# Altium PCB EE3102_PCB_Proj.PcbDoc
Units mil, origin at the board's own origin, x right, y up, seen from the top; angles counter-clockwise.
Board outline 4200 x 2000 mil, 2 copper layers (Top Layer, Bottom Layer); 29 components, 31 nets, 132 pads, 5 vias.
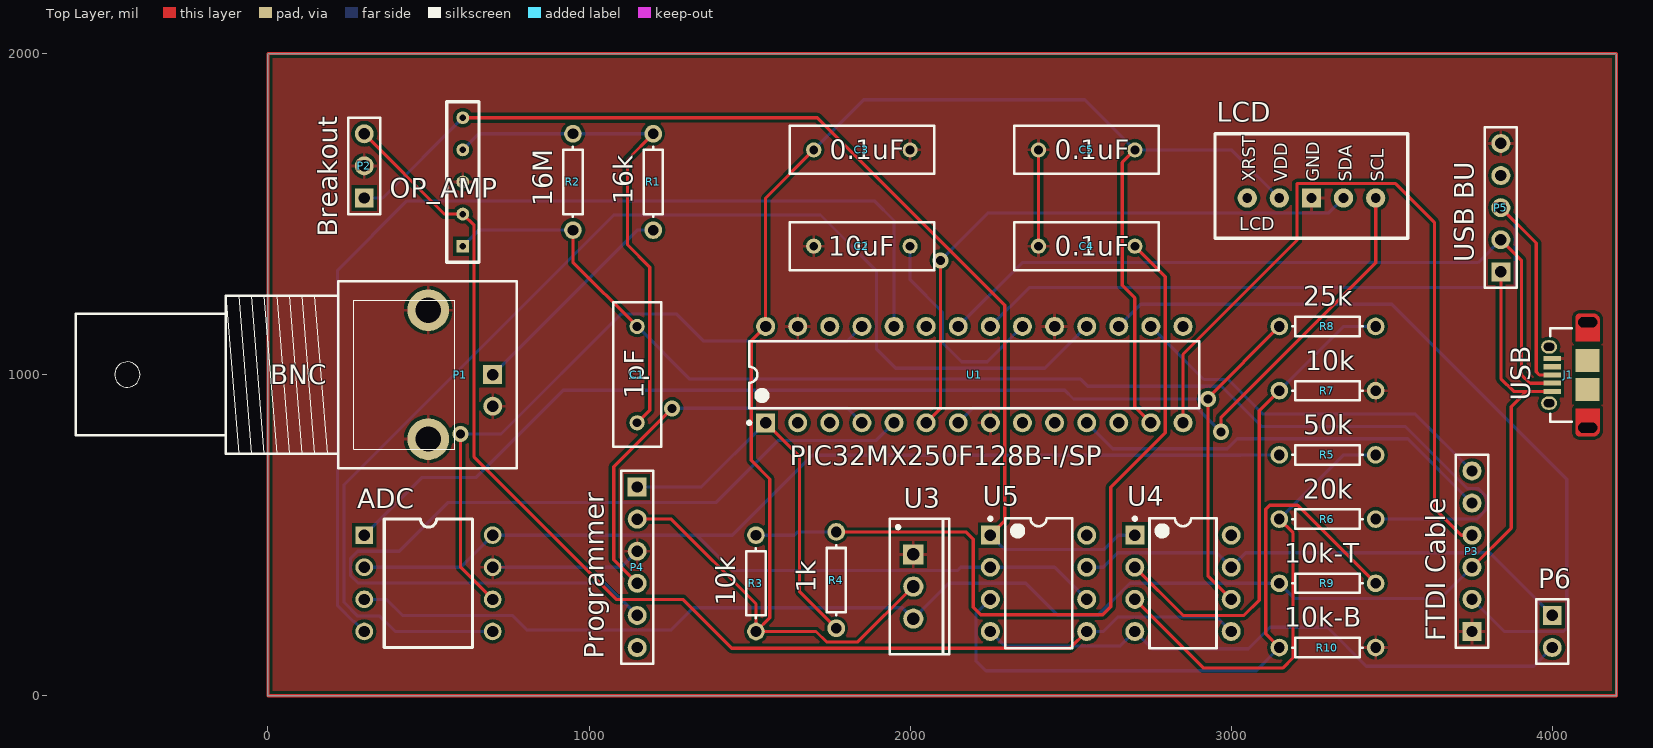
[diagram p0: Top Layer view]
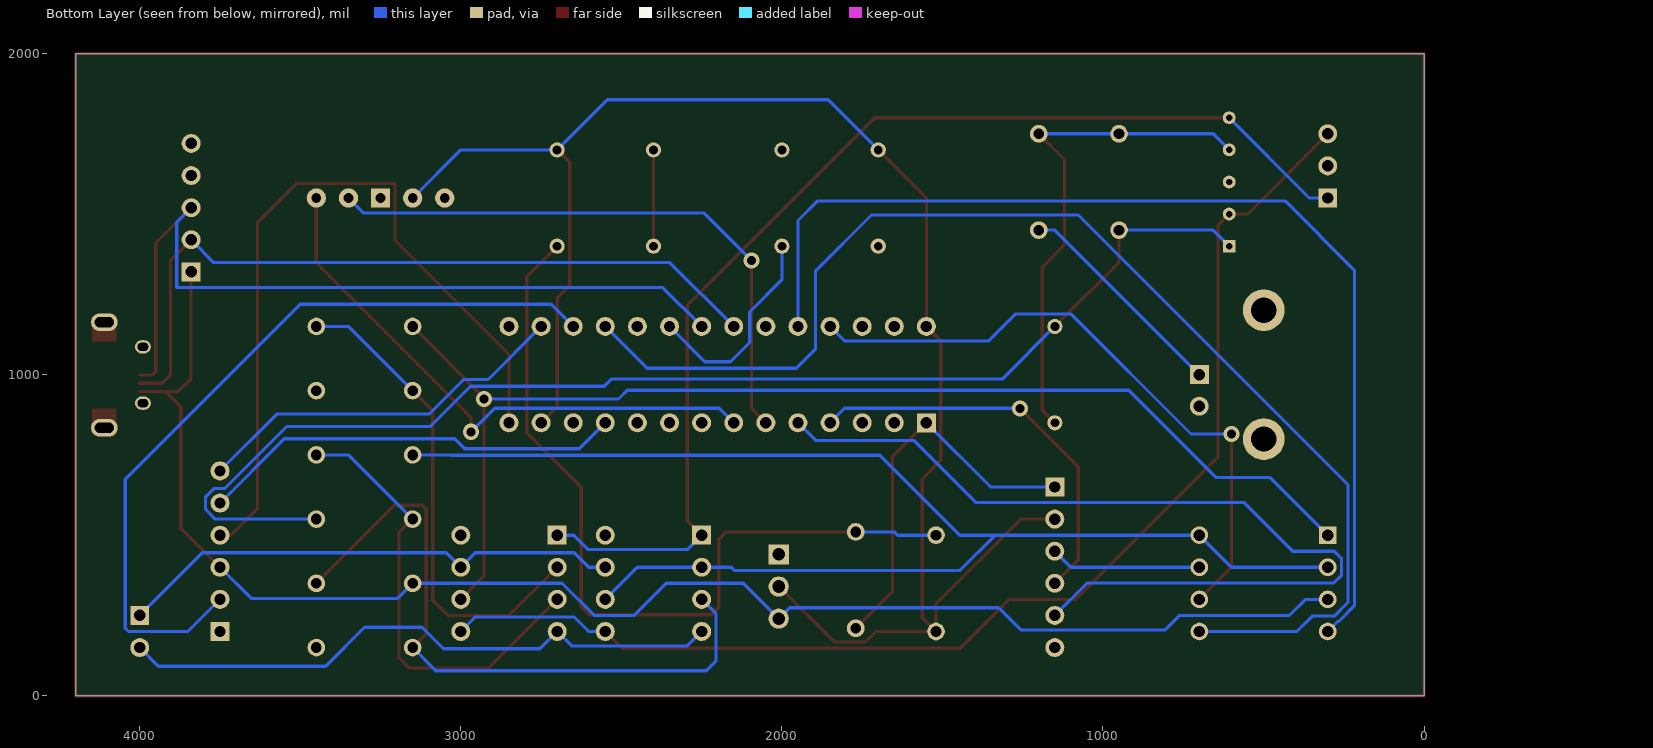
[diagram p1: Bottom Layer view, seen from below]

## Layer stack, top to bottom
Top Solder: solder mask 0.4, Solder Resist, Dk 3.5
Top Layer: signal copper 1.4
Dielectric 1: dielectric 12.6, FR-4, Dk 4.8
Bottom Layer: signal copper 1.4
Bottom Solder: solder mask 0.4, Solder Resist, Dk 3.5

## Board outline
0,0 4200,0 4200,2000 0,2000

## Design rules (kind name [scope] priority, off if disabled: settings)
Clearance [All] p1: gap=10 ignorepadtopadclearanceinfootprint=FALSE except(0: Arc-Hole Track-Hole SMDPad-Hole THPad-Hole Via-Hole Fill-Hole Poly-Hole Region-Hole Text-Hole)
PolygonConnect [All] p1: connectstyle=Relief reliefconductorwidth=10 reliefentries=4 polygonreliefangle="90 Angle" airgapwidth=10
RoomDefinition EE3102_PCB_Proj [InComponentClass('EE3102_PCB_Proj')] p1: confinementstyle=ConfineIn formatcopy=TRUE lockcomponents=FALSE outline 6045,-740 9135,-740 9135,800 6045,800
RoutingVias [All] p1: holewidth=28 width=50 viastyle="Through Hole" minholewidth=28 minwidth=50 maxholewidth=28 maxwidth=50
SolderMaskExpansion [All] p1: expansion=4
Width [All] p1: maxlimit=10 minlimit=10 preferedwidth=10
30 further rules are at their usual default settings.

## Components (designator, comment, footprint, x,y, rotation, side; value= is the part's Value field where it differs from the comment)
ADC "ADC" ADC 300,500 r0 top
C1 "1pF" RAD-0.3 1150,1000 r90 top
C2 "10uF" RAD-0.3 1850,1400 r180 top
C3 "0.1uF" RAD-0.3 1850,1700 r0 top
C4 "0.1uF" RAD-0.3 2550,1400 r180 top
C5 "0.1uF" RAD-0.3 2550,1700 r180 top
J1 "USB" 629105150921 4110.43,998.82 r90 top
LCD "LCD" LCD 3050,1550 r0 top
OP_AMP "Op_Amp_EE3102" OP_AMP 607,1400 r90 top
P1 "BNC" "BNC_RA CON" 700,1000 r0 top
P2 "Breakout" HDR1X3 300,1550 r90 top
P3 "FTDI Cable" HDR1X6 3750,200 r90 top
P4 "Programmer" HDR1X6 1150,650 r270 top
P5 "USB BU" HDR1X5 3840,1320 r90 top
P6 "Header 2" HDR1X2 4000,250 r270 top
R1 "16k" AXIAL-0.3 1200,1600 r90 top
R2 "16M" AXIAL-0.3 950,1600 r270 top
R3 "10k" AXIAL-0.3 1520,350 r270 top
R4 "1k" AXIAL-0.3 1770,360 r270 top value=1K
R5 "50k" AXIAL-0.3 3300,750 r180 top
R6 "20k" AXIAL-0.3 3300,550 r180 top
R7 "10k" AXIAL-0.3 3300,950 r180 top
R8 "25k" AXIAL-0.3 3300,1150 r180 top
R9 "10k-T" AXIAL-0.3 3300,350 r180 top value=10k
R10 "10k-B" AXIAL-0.3 3300,150 r180 top value=10k
U1 "PIC32MX250F128B-I/SP" MCHP-SPDIP-SP28 2200,1000 r90 top
U3 "(Volt Reg) LM1085IT-3.3" T03B 2010,340 r270 top
U4 "LM741CN" N08E 2850,350 r0 top
U5 "LM741CN" N08E 2400,350 r0 top

## Footprints (in the part's own frame and the unit in brackets; to place one, negate y for a bottom-side part, rotate by r counter-clockwise, add the part's x,y. Pads: shape width x height; smd on the part's side, far side on the other; paste and mask are expansions set on the pad)
629105150921 [mm] "Micro USB 2.0 Type AB Horizontal"
  rect 0.4x1.35 smd: 1(-1.3,2.805) 2(-0.65,2.805) 3(0,2.805) 4(0.65,2.805) 5(1.3,2.805)
  round 0 / inner oval 1.4x2.1 / far side oval 1.4x2.1 hole 0.825 slot 1.5 at 90 deg: Shell(-4.175,0)
  oval 1.05x1.25 hole 0.65 slot 0.85 at 90 deg: Shell(-2.225,3.055) Shell(2.225,3.055)
  rect 1.8x1.9 smd: Shell(-1.15,0) Shell(1.15,0)
  round 0 / inner round 0 / far side oval 1.4x2.1 hole 0.825 slot 1.5 at 90 deg: Shell(4.175,0)
  Top Layer region: -4.353,-0.95 -4.544,-0.912 -4.706,-0.804 -4.814,-0.641 -4.852,-0.45 -4.852,-0.45 -4.852,0.65 -4.83,0.765 -4.765,0.862 -4.667,0.927 -4.553,0.95 -4.553,0.95 -2.668,0.95 -2.668,-0.95
  Top Layer region: 4.353,-0.95 4.544,-0.912 4.706,-0.804 4.814,-0.641 4.852,-0.45 4.852,-0.45 4.852,0.65 4.83,0.765 4.765,0.862 4.667,0.927 4.553,0.95 4.553,0.95 2.668,0.95 2.668,-0.95
  silkscreen extent -3.7,1.25 3.7,2.97, body extent -4.3,-2.64 4.3,3.23, height 2.76
ADC [mil]
  rect 55x55 hole 35: 1(0,0)
  round 55 hole 35: 2(0,-100) 3(0,-200) 4(0,-300) 5(400,-300) 6(400,-200) 7(400,-100) 8(400,0)
  silkscreen extent 62,-350 338,50
AXIAL-0.3 [mm] "Axial Device, Thru-Hole; 2 Leads; 0.3 in Pin Spacing"
  round 1.4 hole 0.85: 1(-3.81,0) 2(3.81,0)
  silkscreen extent -2.77,-0.76 2.77,0.76
"BNC_RA CON" [mm] "Connector; BNC Elbow"
  rect 1.5x1.5 hole 0.9: 1(0,0)
  round 3.3 hole 2: 2(-5.1,-5.1) 2(-5.1,5.1)
  round 1.5 hole 0.9: 2(0,-2.5)
  silkscreen extent -33,-7.4 1.9,7.4
HDR1X2 [mm] "Connector; Header; 2 Position"
  rect 1.5x1.5 hole 0.9: 1(0,0)
  round 1.5 hole 0.9: 2(2.54,0)
  silkscreen extent -1.27,-1.27 3.81,1.27
HDR1X3 [mm] "Connector; Header; 3 Position"
  rect 1.5x1.5 hole 0.9: 1(0,0)
  round 1.5 hole 0.9: 2(2.54,0) 3(5.08,0)
  silkscreen extent -1.27,-1.27 6.35,1.27
HDR1X5 [mm] "Connector; Header; 5 Position"
  rect 1.5x1.5 hole 0.9: 1(0,0)
  round 1.5 hole 0.9: 2(2.54,0) 3(5.08,0) 4(7.62,0) 5(10.16,0)
  silkscreen extent -1.27,-1.27 11.43,1.27
HDR1X6 [mm] "Connector; Header; 6 Position"
  rect 1.5x1.5 hole 0.9: 1(0,0)
  round 1.5 hole 0.9: 2(2.54,0) 3(5.08,0) 4(7.62,0) 5(10.16,0) 6(12.7,0)
  silkscreen extent -1.27,-1.27 13.97,1.27
LCD [mil]
  round 60 hole 30: 1(0,0) 2(100,0) 4(300,0) 5(400,0)
  rect 60x60 hole 30: 3(200,0)
  silkscreen extent -100,-125 500,200
MCHP-SPDIP-SP28 [mm] "DIP, 28-Leads, Body 34.86x6.79mm, Pitch 2.54mm"
  rect 1.5x1.5 hole 0.9: 1(-3.81,16.51)
  round 1.5 hole 0.9: 2(-3.81,13.97) 3(-3.81,11.43) 4(-3.81,8.89) 5(-3.81,6.35) 6(-3.81,3.81) 7(-3.81,1.27) 8(-3.81,-1.27) 9(-3.81,-3.81) 10(-3.81,-6.35) 11(-3.81,-8.89) 12(-3.81,-11.43) 13(-3.81,-13.97) 14(-3.81,-16.51) 15(3.81,-16.51) 16(3.81,-13.97) 17(3.81,-11.43) 18(3.81,-8.89) 19(3.81,-6.35) 20(3.81,-3.81) 21(3.81,-1.27) 22(3.81,1.27) 23(3.81,3.81) 24(3.81,6.35) 25(3.81,8.89) 26(3.81,11.43) 27(3.81,13.97) 28(3.81,16.51)
  silkscreen extent -3.93,-17.8 2.65,17.93, body extent -3.95,-17.77 3.95,17.77, height 5.08
N08E [mm] "DIP, 8-Pin, Row Spacing 7.62 mm, Pitch 2.54 mm"
  rect 1.5x1.5 hole 0.9: 1(-3.81,3.81)
  round 1.5 hole 0.9: 2(-3.81,1.27) 3(-3.81,-1.27) 4(-3.81,-3.81) 5(3.81,-3.81) 6(3.81,-1.27) 7(3.81,1.27) 8(3.81,3.81)
  silkscreen extent -3.93,-5.15 2.65,5.23, body extent -3.6,-5.15 3.6,5.15, height 5.34
OP_AMP [mil]
  rect 40x40 hole 20: 1(0,0)
  round 40 hole 20: 2(100,0) 3(200,0) 4(300,0) 5(400,0)
  silkscreen extent -50,-50 450,50
RAD-0.3 [mm] "Radial Cap, Thru-Hole; 2 Leads; 0.3 in Pin Spacing"
  round 1.2 hole 0.7: 1(-3.81,0) 2(3.81,0)
  silkscreen extent -5.71,-1.91 5.71,1.91
T03B [mm] "TO, Thru-Hole, Vertical, Heatsink Mounted; 3 In-Line Leads; Pitch 2.54 mm"
  rect 1.6x1.6 hole 1: 1(-2.54,0)
  round 1.6 hole 1: 2(0,0) 3(2.54,0)
  silkscreen extent -5.35,-1.85 5.35,2.85, body extent -5.4,-1.9 5.4,2.9, height 19.4

## Part data
C1 C2 C3 C4 C5: library part Cap, "Capacitor", LatestRevisionDate=17-Jul-2002, LatestRevisionNote="Re-released for DXP Platform.", PackageDescription="Radial Cap, Thru-Hole; 2 Leads; 0.3 in Pin Spacing", PackageReference=RAD-0.3, Published=8-Jun-2000, Publisher="Altium Limited"
J1: library part 629105150921, "Micro USB 2.0 Type AB Receptacle WR-COM, Horizontal, SMT", Contact Resistance="30 mOhm", Operating Temperature="-40 to 85 degC", Rated Current="1.8 A", Working Voltage="30 VAC", ComponentLink1Description=Manufacturer, ComponentLink1URL=http://www.we-online.de, ComponentLink2Description=Datasheet, ComponentLink2URL=https://katalog.we-online.de/em/datasheet/629105150921.pdf, Connector Type="Micro USB 2.0 Type AB", Gender=Receptacle, Mounting Technology=SMT, Orientation=Horizontal, Packaging="Tape and Reel", Part Number=629105150921, Published Date="September 2018", Publisher="Wurth Elektronik"
OP_AMP: library part Op_Amp
P1: "BNC Elbow Connector", LatestRevisionDate=17-Jul-2002, LatestRevisionNote="Re-released for DXP Platform.", Publisher="Altium Limited"
P2: library part "Header 3", "Header, 3-Pin", LatestRevisionDate=17-Jul-2002, LatestRevisionNote="Re-released for DXP Platform.", Publisher="Altium Limited"
P3 P4: library part "Header 6", "Header, 6-Pin", LatestRevisionDate=17-Jul-2002, LatestRevisionNote="Re-released for DXP Platform.", Publisher="Altium Limited"
P5: library part "Header 5", "Header, 5-Pin", LatestRevisionDate=17-Jul-2002, LatestRevisionNote="Re-released for DXP Platform.", Publisher="Altium Limited"
P6: "Header, 2-Pin", LatestRevisionDate=17-Jul-2002, LatestRevisionNote="Re-released for DXP Platform.", Publisher="Altium Limited"
R1 R2 R3 R4 R5 R6 R7 R8 R9 R10: library part Res1, "Resistor", LatestRevisionDate=17-Jul-2002, LatestRevisionNote="Re-released for DXP Platform.", PackageDescription="Axial Device, Thru-Hole; 2 Leads; 0.3 in Pin Spacing", PackageReference=AXIAL-0.3, Published=8-Jun-2000, Publisher="Altium Limited"
U1: "32-bit Microcontroller with Audio and Graphics Interface, USB and Advanced Analog, 50 MHz, 19 I/O, PMP, -40 to 85 degC, 28-pin SPDIP (SP28), Tube", Manufacturer=Microchip, Supplier Part Number 1=PIC32MX250F128B-I/SP-ND, ComponentLink1Description="Manufacturer URL", ComponentLink1URL=http://www.microchip.com, ComponentLink2Description=Datasheet, ComponentLink2URL=http://ww1.microchip.com/downloads/en/DeviceDoc/61168E.pdf, ComponentLink3Description="Package Specification", ComponentLink3URL=http://www.microchip.com/stellent/groups/techpub_sg/documents/packagingspec/en012702.pdf, ComponentLink4Description="Product URL", ComponentLink4URL=http://www.microchip.com/PIC32MX250F128B, DatasheetVersion="Rev. E", Mounting Technology="Through Hole", PackageDescription="28-Lead Plastic Dual In-Line, 34.86 x 6.79 mm Body, 2.54 mm Pitch", PackageReference=SPDIP-SP28, PackageVersion=C04-070B, PartNumber=PIC32MX250F128B-I/SP, Supplier 1=Digi-Key, Supplier 2=Farnell, Supplier 3=Newark, Supplier 4=Mouser, Supplier Part Number 2=2097773, Supplier Part Number 3=73T1453, Supplier Part Number 4=579-32MX250F128BISP
U3: library part LM1085IT-3.3, "3A Low Dropout Positive Regulators, 3-pin TO-220", Manufacturer="National Semiconductor", PackageTopMarking=NSUZXYTTE#*LM1085*IT-3.3, PowerWise=N, ComponentLink1Description="Manufacturer URL", ComponentLink1URL=http://www.national.com/, ComponentLink2Description="LM1085 Datasheet", ComponentLink2URL=http://www.national.com/ds/LM/LM1085.pdf, ComponentLink3Description="LM1085 Web Page", ComponentLink3URL=http://www.national.com/pf/LM/LM1085.html, ComponentLink4Description="T03B Package Page", ComponentLink4URL=http://www.national.com/packaging/folders/t03b.html, CompType="LDO IC", DatasheetVersion=Jun-2005, High-Reliability=Y, PackageDescription="TO-220, Molded, 3 Lead, Straight", PackageReference=T03B, PackageVersion="revL, Jan-1992", PartNumber=LM1085IT-3.3, PinCount=3, RoHS=N
U4 U5: "Operational Amplifier, 8-pin MDIP", Manufacturer="National Semiconductor", PackageTopMarking=NSUZXYTTE#*LM*741CN, PowerWise=N, Code_JEDEC=MS-001-BA, ComponentLink1Description="Manufacturer URL", ComponentLink1URL=http://www.national.com/, ComponentLink2Description="LM741 Datasheet", ComponentLink2URL=http://www.national.com/ds/LM/LM741.pdf, ComponentLink3Description="LM741 Web Page", ComponentLink3URL=http://www.national.com/pf/LM/LM741.html, ComponentLink4Description="N08E Package Page", ComponentLink4URL=http://www.national.com/packaging/folders/n08e.html, CompType=Amplifiers, DatasheetVersion=Aug-2000, High-Reliability=Y, PackageDescription="MDIP, .365 x .250 x .130in, 8 Lead, .100in Pitch", PackageReference=N08E, PackageVersion="revG, May-2006", PartNumber=LM741CN, PinCount=8, RoHS=N

## Via types
v1: diameter 50, hole 28, Top Layer to Bottom Layer, 5 vias

## Nets (pads, with @x,y where several pads share a name; then routed paths per layer and width w, separated by ;. In a path a pad name is that pad's centre, name@x,y a point inside that pad or via, vN(x,y) a via of type N, cw(c..) or ccw(c..) an arc to the next point about the centre after c; other vN are vias at no path point)
GND: ADC.7 C2.2 C3.2 C4.2 C5.2 J1.5 LCD.3 OP_AMP.3 P1.2 P2.2 P3.1 P4.3 P5.5 R7.1 R10.1 U1.8 U1.19 U1.27 U3.1 | length 770.7
  Top Layer w10: C4.2 C5.2
  Bottom Layer w10: ADC.7 1100,400 P4.3
NetADC_1: ADC.1 R8.2 U4.6 | length 3797.8
  Top Layer w10: U4.6 2928,372 v1(2928,924) 2928,928 R8.2
  Bottom Layer w10: ADC.1 480,680 649,680 920,951 2482,951 2509,924 v1(2928,924)
NetADC_2: ADC.2 ADC.8 R5.2 U5.2 U5.6 | length 4300.1
  Bottom Layer w10: ADC.2 600,400 ADC.8 1336,500 ; U5.6 2450,400 U5.2 2158,400 2148,390 1446,390 1336,500 ; R5.2 3029,750 3028,749 1695,749 1446,500 1336,500
NetADC_3: ADC.3 J1.1 P3.3 P5.1 R9.2 U3.3 | length 4847.1
  Top Layer w10: P3.3 3872,522 3872,899.64 3920,947.64 ; P5.1 3840,987.64 3880,947.64 3920,947.64 ; J1.1 3920,947.64
  Bottom Layer w10: ADC.3 369,300 419,250 761,250 806,205 1256,205 1325,274 1976,274 U3.3 2120,350 2360,350 2460,250 2585,250 2685,350 R9.2 3197,303 3653,303 P3.3
NetADC_4: ADC.4 U1.24 | length 3338.9
  Bottom Layer w10: ADC.4 269,231 266,231 217,280 217,1325 433,1541 1889,1541 1950,1480 U1.24
NetADC_5: ADC.5 U1.18 | length 3921.4
  Bottom Layer w10: ADC.5 396,200 348,248 280,248 237,291 237,657 1077,1497 1721,1497 1895,1323 1895,1080 1955,1020 2420,1020 U1.18
NetADC_6: ADC.6 U1.25 | length 2014.8
  Top Layer w10: v1(600,815) 600,400 ADC.6
  Bottom Layer w10: v1(600,815) 726,815 1100,1189 1272,1189 1356,1105 1805,1105 U1.25
NetC1_1: C1.1 OP_AMP.4 R1.2 R2.1 | length 1591.6
  Top Layer w10: C1.1 1189,889 1189,1335 1120,1404 1120,1670 R1.2
  Bottom Layer w10: OP_AMP.4 657,1750 R2.1 R1.2
NetC1_2: C1.2 OP_AMP.1 R2.2 R6.1 | length 4008.5
  Top Layer w10: R2.2 950,1350 C1.2
  Bottom Layer w10: OP_AMP.1 657,1450 R2.2 ; C1.2 1314,986 2531,986 2553,964 2970,964 3096,838 3543,838 3736,645 3770,645 3795,620 3795,580 3765,550 R6.1
NetC2_1: C2.1 U1.20 | length 661.8
  Bottom Layer w10: C2.1 2000,1295 2100,1195 2100,1100 2160,1040 2240,1040 U1.20
NetC3_1: C3.1 C5.1 LCD.2 P4.2 R3.2 U1.13 U1.28 U3.2 | length 5307.3
  Top Layer w10: P4.2 1256,550 1520,286 R3.2 ; C3.1 1550,1550 U1.28 1505,1105 1505,733 1563,675 1563,243 R3.2 ; U3.2 1837.44,167.44 1739.56,167.44 1707,200 R3.2 ; C5.1 2661,1661 2661,1278 2700,1239 2700,900 U1.13
  Bottom Layer w10: C3.1 1856,1856 2544,1856 C5.1 3000,1700 LCD.2
NetC4_1: C4.1 R3.1 R4.1 | length 2583.3
  Top Layer w10: R4.1 2174,510 2197,487 2197,275 2220,252 2600,252 2625,277 2625,649 2795,819 2795,1305 C4.1
  Bottom Layer w10: R3.1 1640,500 1650,510 R4.1
NetJ1_2: J1.2 P5.2 U1.22 | length 2355.4
  Top Layer w10: P5.2 3904,1356 3904,1000 3930.77,973.23 J1.2
  Bottom Layer w10: U1.22 2349,1349 3769,1349 P5.2
NetJ1_3: J1.3 P5.3 U1.21 | length 2563.6
  Top Layer w10: P5.3 3950,1410 3950,1008.82 3960,998.82 J1.3
  Bottom Layer w10: U1.21 2371,1271 3885,1271 3885,1475 P5.3
NetLCD_4: LCD.4 U1.6 | length 1860
  Top Layer w10: U1.6 2095,895 v1(2095,1356)
  Bottom Layer w10: v1(2095,1356) 2242,1503 3303,1503 LCD.4
NetLCD_5: LCD.5 U1.7 | length 1794.5
  Top Layer w10: v1(2968,822) 2968,866 3450,1348 LCD.5
  Bottom Layer w10: U1.7 2195,895 2895,895 v1(2968,822)
NetOP_AMP_2: OP_AMP.2 P2.3 U4.5 U5.5 | length 3845.8
  Top Layer w10: P2.3 550,1500 OP_AMP.2 642,1465 642,743 1085,300 1292,300 1444.56,147.44 2497.44,147.44 U5.5
  Bottom Layer w10: U5.5 2602,200 2647,245 2955,245 U4.5
NetOP_AMP_5: OP_AMP.5 P2.1 U4.1 U5.1 | length 3562.5
  Top Layer w10: OP_AMP.5 1711.15,1800 2295,1216.15 2295,545 U5.1
  Bottom Layer w10: P2.1 357,1550 OP_AMP.5 ; U5.1 2295,455 2603,455 2648,500 U4.1
NetP1_1: P1.1 R1.1 | length 686.4
  Bottom Layer w10: P1.1 1150,1450 R1.1
NetP3_2: P3.2 U1.17 | length 2453.9
  Bottom Layer w10: U1.17 2719,1219 3500,1219 4045,674 4045,210 4035,200 3850,200 P3.2
NetP3_4: P3.4 U1.14 | length 2412
  Top Layer w10: U1.14 2850,1063 3205,1418 3205,1595 3512,1595 3633,1474 3633,584 3717,500 P3.4
NetP3_5: P3.5 U1.11 | length 1329.2
  Bottom Layer w10: U1.11 2631,769 2988.19,769 3019.19,800 3550,800 P3.5
NetP3_6: P3.6 U1.16 | length 1186.4
  Bottom Layer w10: U1.16 2915.16,984.84 2991.1,984.84 3099.01,876.92 3573.08,876.92 P3.6
NetP4_1: P4.1 R4.2 U1.1 | length 1214
  Top Layer w10: U1.1 1656,744 1656,324 R4.2
  Bottom Layer w10: P4.1 1350,650 U1.1
NetP4_4: P4.4 U1.4 | length 1260.3
  Top Layer w10: P4.4 1077,423 1077,713 v1(1259,895)
  Bottom Layer w10: v1(1259,895) 1805,895 U1.4
NetP4_5: P4.5 U1.5 | length 2865
  Bottom Layer w10: P4.5 1049,351 281,351 257,375 257,427 280,450 409,450 561,602 1396,602 1589,795 1895,795 U1.5
NetP6_1: P6.1 U4.7 U5.7 | length 1586.7
  Bottom Layer w10: U5.7 2602,400 2647,445 2955,445 U4.7 3045,445 3805,445 P6.1
NetP6_2: P6.2 U4.4 U5.4 | length 1911.5
  Bottom Layer w10: U5.4 2295,155 2655,155 U4.4 2754,146 3054,146 3121,213 3300,213 3421,92 3942,92 P6.2
NetR5_1: R5.1 R6.2 U4.3 | length 1427
  Top Layer w10: U4.3 2914,86 3160,86 3193,119 3193,507 R6.2
  Bottom Layer w10: R6.2 3350,750 R5.1
NetR7_2: R7.2 R8.1 U4.2 | length 1530.5
  Top Layer w10: U4.2 2850,250 3040,250 3087.44,297.44 3087.44,887.44 R7.2
  Bottom Layer w10: R7.2 3350,1150 R8.1
NetR9_1: R9.1 R10.2 U5.3 | length 2093.8
  Top Layer w10: R10.2 3107.44,192.56 3107.44,580.44 3120,593 3207,593 R9.1
  Bottom Layer w10: U5.3 2205,255 2205,109 2236,78 3078,78 R10.2
pads on no net: J1.4 J1.Shell LCD.1 P4.6 P5.4 U1.2 U1.3 U1.9 U1.10 U1.12 U1.15 U1.23 U1.26 U4.8 U5.8
copper on no net: | length 12400
  Top Layer w10: 0,0 0,2000 4200,2000 4200,0 0,0

## Polygon pours and split planes (outlines as drawn)
GND on Top Layer "Ground" (solid, pour order 0): 0,2000 0,0 4200,0 4200,2000

## Text inside footprints (layer, text, board x,y; h text height)
J1: Mechanical 2 "PCB Edge" at 4189.17,955.51 h16 r90
LCD: Top Overlay "SCL" at 3475,1600 h40 r90; Top Overlay "SDA" at 3375,1600 h40 r90; Top Overlay "GND" at 3275,1600 h40 r90; Top Overlay "VDD" at 3175,1600 h40 r90; Top Overlay "XRST" at 3075,1600 h40 r90